# Altium PCB 180222.PcbDoc (part 1 of 5)
Units mil, origin at the board's own origin, x right, y up, seen from the top; angles counter-clockwise.
Board outline 6880.23 x 4505.03 mil, 2 copper layers (Top Layer, Bottom Layer); 136 components, 176 nets, 656 pads, 225 vias.
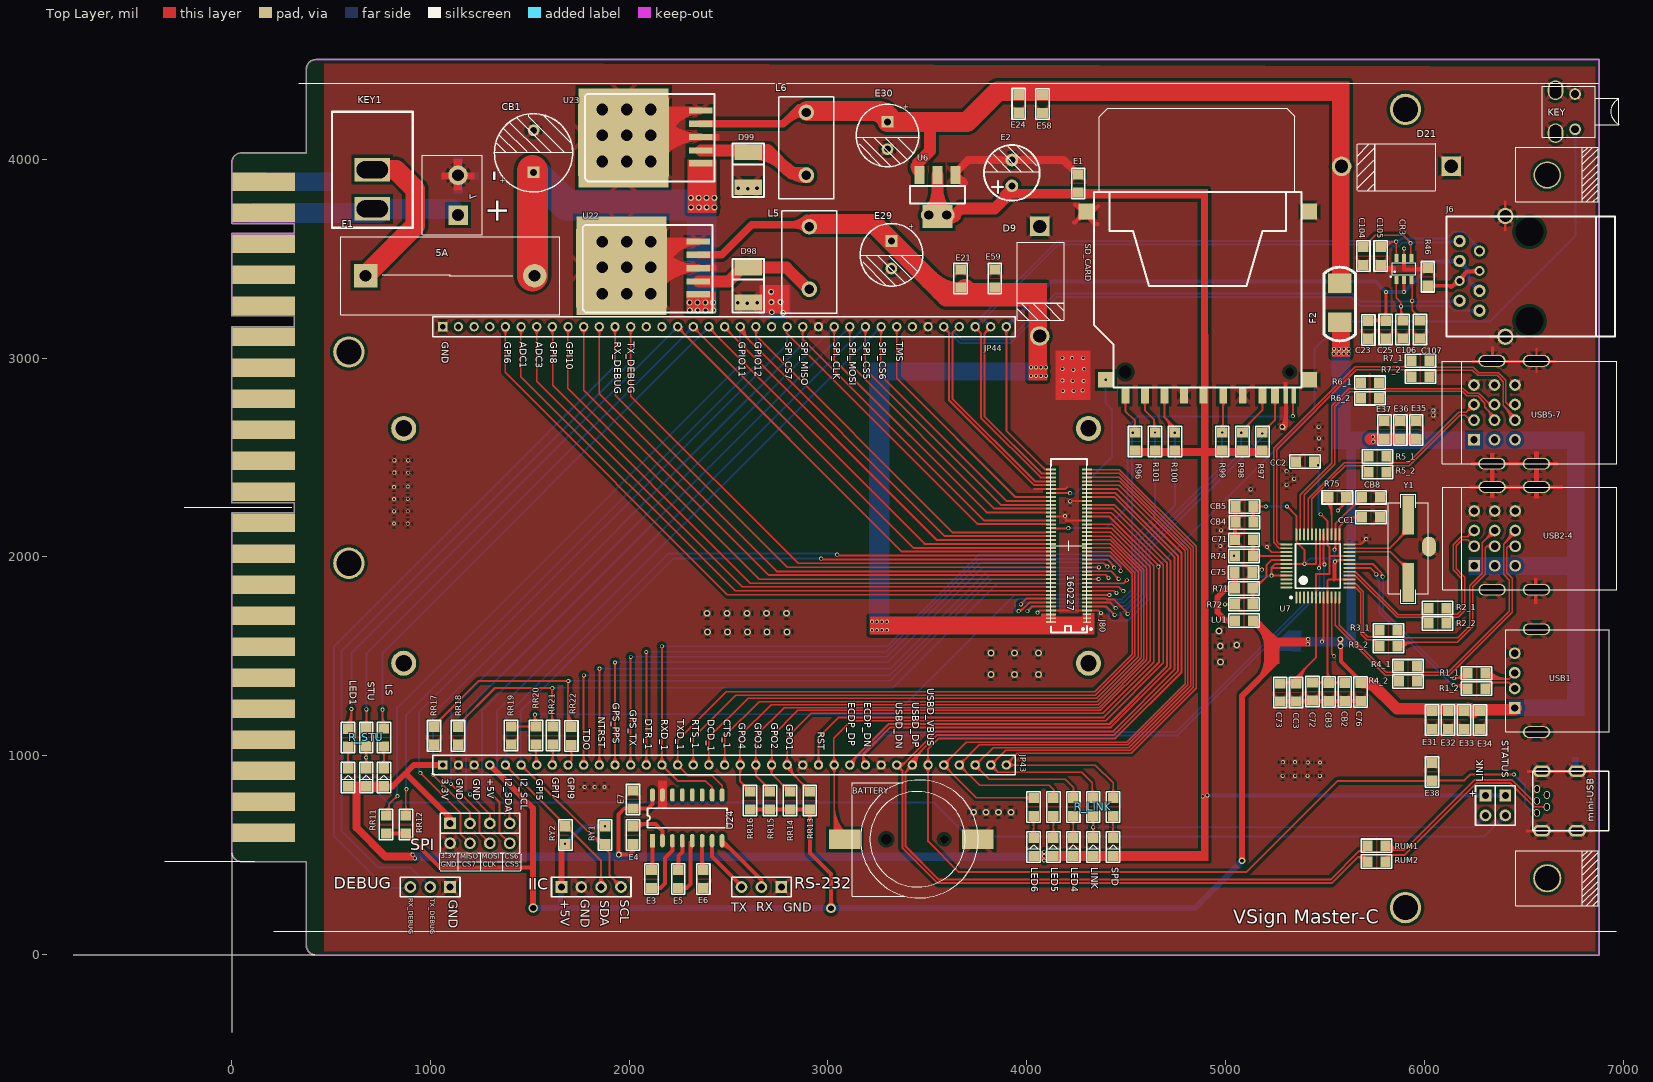
[diagram p0: Top Layer view]
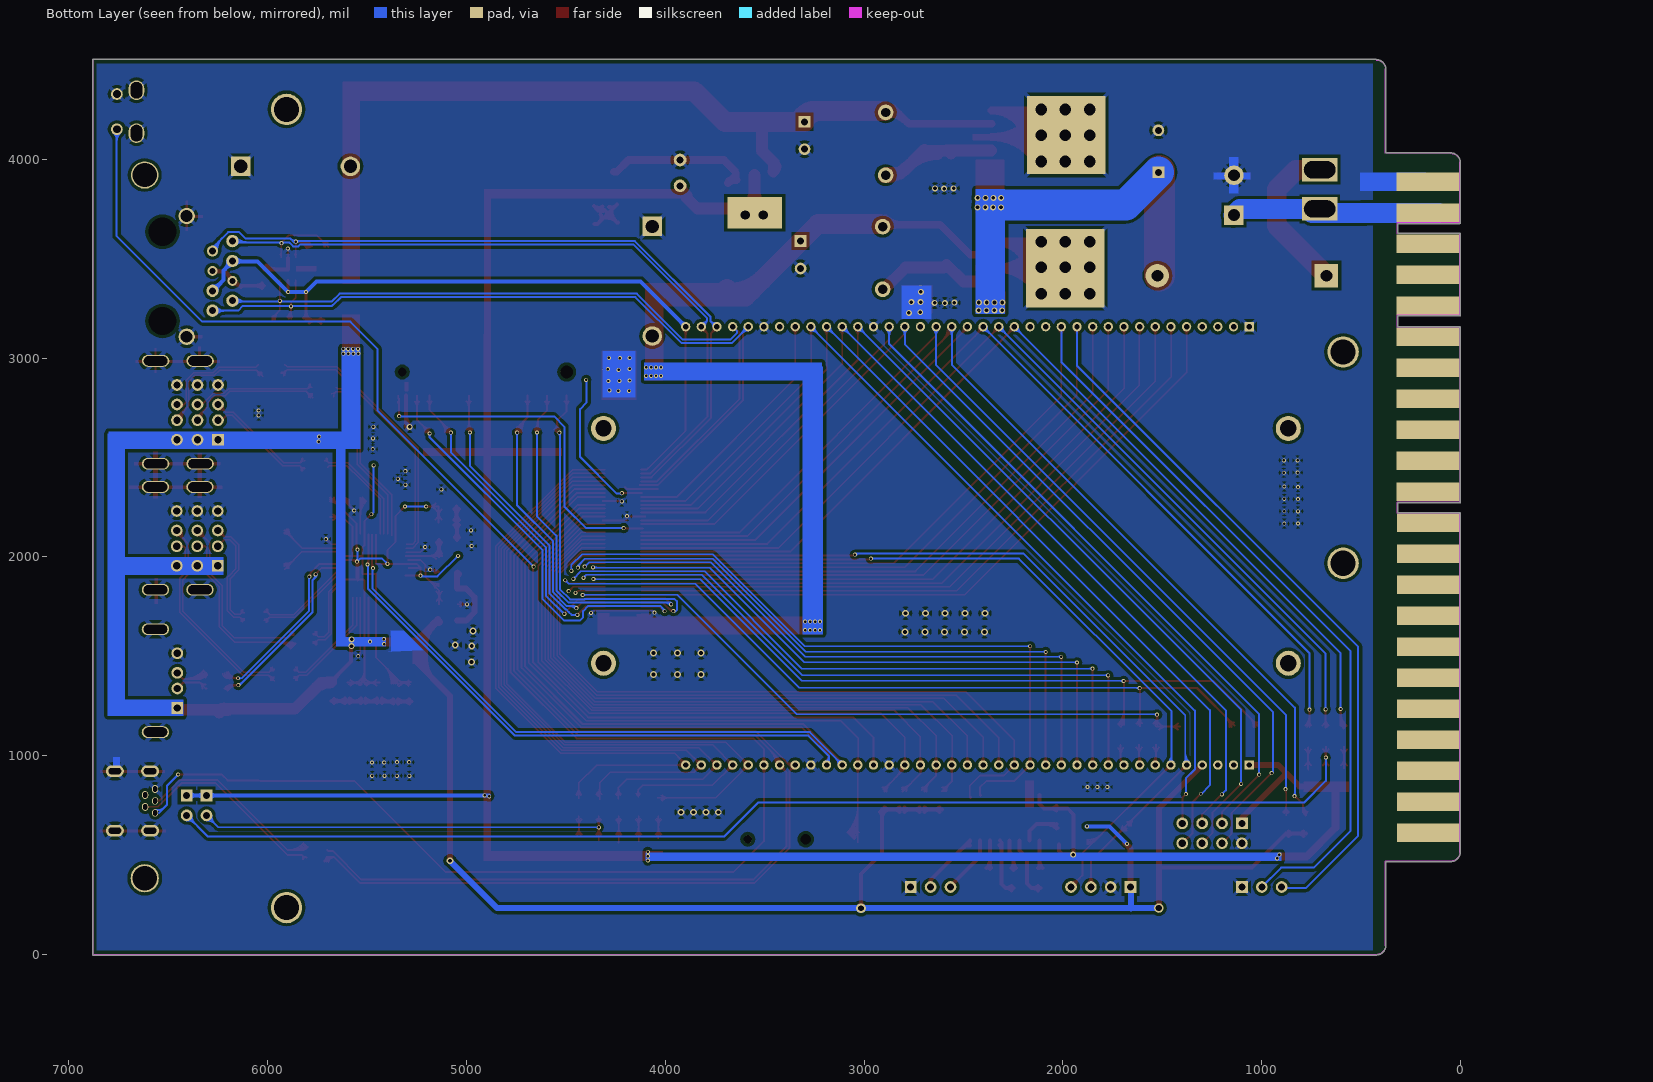
[diagram p1: Bottom Layer view, seen from below]

## Layer stack, top to bottom
Top Solder: solder mask 0.4, Solder Resist, Dk 3.5
Top Layer: signal copper 1.4
Dielectric1: dielectric 12.6, FR-4, Dk 4.8
Bottom Layer: signal copper 1.4
Bottom Solder: solder mask 0.4, Solder Resist, Dk 3.5

## Board outline
1.29,510 1.29,2220 cw(c3.8,2220) 3.8,2222.51 316.48,2222.51 316.48,2272.49 3.8,2272.49 cw(c3.8,2275) 1.29,2275 1.29,3155 cw(c3.8,3155) 3.8,3157.52 316.48,3157.52 316.48,3212.48 3.8,3212.48 cw(c3.8,3215) 1.29,3215 1.29,3625 cw(c3.8,3625) 3.8,3627.52 316.48,3627.52 316.48,3677.48 3.8,3677.48 cw(c3.8,3680) 1.29,3680 1.29,3985 cw(c3.8,3985) 1.78,3986.49 cw(c49,3985.28) 49,4032.52 376.29,4032.52 376.29,4455 cw(c378.8,4455) 376.78,4456.49 cw(c424,4455.28) 424,4502.52 6879,4502.52 cw(c6879,4500) 6881.52,4500 6881.52,0 cw(c6879,0) 6879,-2.51 424,-2.51 cw(c424,0) 422.83,-2.23 cw(c423.72,45) 376.5,44 cw(c378.8,45) 376.29,45 376.29,467.48 49,467.48 cw(c49,470) 47.83,467.77 cw(c48.72,515) 1.96,508.28 cw(c3.8,510)

## Design rules (kind name [scope] priority, off if disabled: settings)
Clearance [All] p1: gap=7
HoleToHoleClearance [All] p1: gap=6 allowstackedmicrovias=TRUE
MinimumSolderMaskSliver [All] p1: minsoldermaskwidth=6
PlaneConnect [All] p1: planeconnectstyle=Relief reliefexpansion=20 reliefentries=4 reliefconductorwidth=20 reliefairgap=10
PolygonConnect [All] p1: connectstyle=Relief reliefconductorwidth=20 reliefentries=4 polygonreliefangle="45 Angle" airgapwidth=10
RoutingVias [All] p1: holewidth=28 width=50 viastyle="Through Hole" minholewidth=28 minwidth=50 maxholewidth=28 maxwidth=50
SilkToSilkClearance [All] p1: silktosilkclearance=6
SilkToSolderMaskClearance SilkscreenOverComponentPads [IsPad] p1: minsilkscreentomaskgap=10 clearancetoexposedcopper=TRUE
SolderMaskExpansion [All] p1: expansion=4
Width [All] p1: maxlimit=100 minlimit=6 preferedwidth=10
25 further rules are at their usual default settings.

## Classes and differential pairs
component class linux_B: BATTERY C2 C3 C4 C5 C7 C8 C9 C10 C21 C23 C25 C37 C39 C42 C44 C47 C71 C72 C73 C75 C89 C90 C104 C105 C106 C107 CB2 CB3 CB4 CB5 CB8 CC1 CC2 CC3 CR1 CR2 CR3 CR41 CR42 D1 D2 D3 D4 D5 D6 D7 D8

## Components (designator, comment, footprint, x,y, rotation, side; value= is the part's Value field where it differs from the comment)
7 "5.08座" CON2_5.08 1140,3720 r90 top
BATTERY "BATTERY座" BATTERY-S 3046,580 r180 top
C23 "1UF" 0805c 5719,3182 r270 top
C25 "1UF" 0805c 5806,3104 r90 top
C71 "104" 0805c 5133,2086 r180 top
C72 "10UF" 0805c 5438,1362 r270 top
C73 "10UF" 0805c 5276,1358 r270 top
C75 "104" 0805c 5052,1922 r0 top
C76 "104" 0805c 5680,1360 r270 top (schematic designator C75)
C104 "150P" 0805c 5694,3474 r90 top
C105 "150P" 0805c 5781,3474 r90 top
C106 "150P" 0805c 5891,3105 r90 top
C107 "150P" 0805c 5978,3105 r90 top
CB1 "1000uF" CAPPR6-10x5/H.9 1520,3920 r90 top
CB2 "Cap" 0805c 5600,1361 r270 top
CB3 "Cap" 0805c 5520,1361 r270 top
CB4 "Cap" 0805c 5135,2174 r180 top
CB5 "Cap" 0805c 5135,2254 r180 top
CB8 "Cap" 0805c 5693,2300 r0 top (schematic designator CB1)
CC1 "Cap" 0805c 5693,2200 r0 top
CC2 "Cap" 0805c 5439,2480 r180 top
CC3 "Cap" 0805c 5356,1358 r270 top
CR3 "DALC208SC6" SOT23_6 5898,3449 r0 top
D9 "1N6373" DO201_AD 4071,3387 r270 top
D11 "LED" 0805_LED1 587,852.35 r90 top
D12 "LED" 0805_LED1 678,852.35 r90 top
D13 "LED" 0805_LED1 767,852.35 r90 top
D14 "LED" 0805_LED1 4235,502 r90 top
D15 "LED" 0805_LED1 4135,502 r90 top
D16 "LED" 0805_LED1 4035,502 r90 top
D17 "LED" 0805_LED1 4335,502 r90 top
D18 "LED" 0805_LED1 4435,502 r90 top
D21 "1N6373" DO201_AD 5860,3960 r180 top
D98 "1N5824" D3.5/5 2600,3280 r180 top
D99 "1N5824" D3.5/5 2600,3860 r180 top (schematic designator D98)
DEBUG "Comment" HDR1X3 1100,340 r180 top
E1 "0.1uf" 0805C 4260,3840 r90 top
E2 "330uF" RE1/3 3926,3932 r90 top
E3 "0.1uf" 0805C 2113,419 r270 top (schematic designator E1)
E4 "0.1uf" 0805C 2020,640 r270 top (schematic designator E1)
E5 "0.1uf" 0805C 2248,419 r270 top (schematic designator E1)
E6 "0.1uf" 0805C 2374,419 r270 top (schematic designator E1)
E7 "0.1uf" 0805C 2020,820 r270 top (schematic designator E1)
E21 "Cap" 0805c 3668,3440 r270 top (schematic designator C73)
E24 "Cap" 0805c 3960,4319 r270 top (schematic designator C73)
E29 "330uF" CAPPR3.5-8x5/H.9 3320,3520 r270 top
E30 "330uF" CAPPR3.5-8x5/H.9 3300,4120 r270 top (schematic designator E29)
E31 "104" 0805c 6040,1220 r270 top (schematic designator C107)
E32 "104" 0805c 6120,1220 r270 top (schematic designator C107)
E33 "104" 0805c 6200,1220 r270 top (schematic designator C107)
E34 "104" 0805c 6280,1220 r270 top (schematic designator C107)
E35 "104" 0805c 5960,2600 r90 top (schematic designator C107)
E36 "104" 0805c 5880,2600 r90 top (schematic designator C107)
E37 "104" 0805c 5800,2600 r90 top (schematic designator C107)
E38 "104" 0805c 6040,880 r90 top (schematic designator C107)
E58 "510" 0805c 4080,4240 r90 top (schematic designator R28)
E59 "510" 0805c 3840,3440 r270 top (schematic designator R28)
F1 "5A" F1保险管座 1100,3415 r0 top
F2 "2A" 1808D 5575,3180 r90 top
IIC "Comment" HDR1X4#1 1660,340 r0 top
J6 "Comment" RJ45_ET8 6525,3410 r0 top
J80 "MHDR2X40" DF12E-80DP-0.5V_X 4213,2056 r180 top
JP43 "Header_37" HDR1X37_2.0 1063.39,953.64 r0 top
JP44 "Header_37" HDR1X37_2.0 1063.39,3158.36 r0 top
KEY "Comment" KEY_90 6759,4240 r270 top
KEY1 "Comment" 2Pin_Key 709,3948 r180 top
L5 "Comment" H_L 2907,3662 r0 top
L6 "Comment" H_L 2892,4236 r0 top
LINK "" HDR1X2 6308,800 r270 top
LU1 "15uH(4.7)" 0805c 5133,1680 r180 top
mini-USB "Comment" mimi_USB直插 6567,773 r90 top
R1_1 "22" 0805c 6303,1415 r180 top (schematic designator 22)
R1_2 "22" 0805c 6303,1338 r180 top (schematic designator 22)
R2_1 "22" 0805c 6107,1743 r180 top (schematic designator 22)
R2_2 "22" 0805c 6107,1666 r180 top (schematic designator 22)
R3_1 "22" 0805c 5860,1631 r180 top (schematic designator 22)
R3_2 "22" 0805c 5860,1551 r180 top (schematic designator 22)
R4_1 "22" 0805c 5958,1451 r180 top (schematic designator 22)
R4_2 "22" 0805c 5958,1374 r180 top (schematic designator 22)
R5_1 "22" 0805c 5804,2506 r180 top (schematic designator 22)
R5_2 "22" 0805c 5804,2427 r180 top (schematic designator 22)
R6_1 "22" 0805c 5766,2877 r180 top (schematic designator 22)
R6_2 "22" 0805c 5766,2798 r180 top (schematic designator 22)
R7_1 "22" 0805c 6020,2987 r180 top (schematic designator 22)
R7_2 "22" 0805c 6020,2907 r180 top (schematic designator 22)
R21 "Res2" 0805c 587,1130.35 r270 top
R23 "Res2" 0805c 767,1131.35 r270 top
R24 "Res2" 0805C 4235,782 r270 top
R25 "Res2" 0805C 4135,782 r270 top
R26 "Res2" 0805C 4035,782 r270 top
R28 "Res2" 0805c 4435,782 r270 top
R46 "0" 0805c 6018,3449 r270 top
R71 "47K" 0805C 5132,1842 r180 top
R72 "100K" 0805C 5132,1762 r180 top
R74 "100K" 0805C 5133,2005 r180 top
R75 "2.7K" 0805C 5602,2300 r180 top
R96 "47K" 0805c 4546,2620 r270 top
R97 "47K" 0805c 5186,2620 r270 top
R98 "47K" 0805c 5086,2620 r270 top
R99 "47K" 0805c 4984,2620 r270 top
R100 "47K" 0805c 4746,2620 r270 top
R101 "47K" 0805c 4646,2620 r270 top
R_LINK "330" 0805C 4335,782 r270 top (schematic designator R27)
R_STU "330" 0805c 678,1132.35 r270 top (schematic designator R22)
RR11 "10K" 0805c 778,693 r270 top (schematic designator R23)
RR12 "10K" 0805c 878,693 r270 top (schematic designator R23)
RR13 "10K" 0805c 2909,814 r270 top (schematic designator R23)
RR14 "10K" 0805c 2810,814 r270 top (schematic designator R23)
RR15 "10K" 0805c 2709,814 r270 top (schematic designator R23)
RR16 "10K" 0805c 2609,814 r270 top (schematic designator R23)
RR17 "Res2" 0805c 1020,1140 r270 top (schematic designator R23)
RR18 "Res2" 0805c 1140,1140 r270 top (schematic designator R23)
RR19 "Res2" 0805c 1407,1141 r270 top (schematic designator R23)
RR20 "Res2" 0805c 1532,1141 r270 top (schematic designator R23)
RR21 "Res2" 0805c 1617,1141 r270 top (schematic designator R23)
RR22 "Res2" 0805c 1710,1139 r270 top (schematic designator R23)
RS-232 "Comment" HDR1X3 2766,340 r180 top
RUM1 "22" 0805c 5800,548 r180 top (schematic designator 22)
RUM2 "22" 0805c 5800,468 r180 top (schematic designator 22)
RY1 "10K" 0805c 1880,640 r270 top (schematic designator R23)
RY2 "10K" 0805c 1680,640 r270 top (schematic designator R23)
SD_CARD "SD_Card_socket" SD_card_soc 4866,3280 r90 top
SPI "Comment" HDR1X4#1 1100,660 r0 top
U6 "AMS1117-3.3" SOT-223 3641.76,3921.75 r180 top
U7 "FE2.1" LQFP48 5464.88,1955.35 r90 top
U22 "LM2596-5V" T0263-5L 2349,3321 r90 top
U23 "LM2596-5V" T0263-5L 2360,3980 r90 top (schematic designator U22)
U24 "Comment" SOP16 2118,573 r90 top
USB1 "USB_L" USB1_DIP 6455,1240 r90 top (schematic designator USB7)
USB2-4 "Comment" USB-3 6565,1835 r90 top
USB5-7 "Comment" USB-3 6564,2469 r90 top
Y1 "12MHZ" XTAL-BS 5920,2043 r90 top
? "Comment" HDR1X4#2 1100,560 r0 top
? "Comment" CON_90#1 6619,3924 r0 top
? "Comment" CON_90#2 6619,384 r0 top
? "" HDR1X2 6408,800 r270 top

## Footprints (in the part's own frame and the unit in brackets; to place one, negate y for a bottom-side part, rotate by r counter-clockwise, add the part's x,y. Pads: shape width x height; smd on the part's side, far side on the other; paste and mask are expansions set on the pad)
2Pin_Key [mm]
  rect 4.5x3 hole 2.2 slot 4 at 0 deg: 1(0,5) 2(0,0)
  silkscreen extent -5.15,-7.4 5.15,7.4
0805_LED1 [mm]
  rect 1.3x1.35 smd: 1(-0.15,0) 2(2.15,0)
  silkscreen extent -0.95,-0.85 2.95,0.85, body extent -0.13,-0.89 2.29,0.89, height 1
0805c [mm]
  rect 1.3x1.35 smd: 1(-0.15,0) 2(2.15,0)
  silkscreen extent -0.95,-0.85 2.95,0.85, body extent -0.13,-0.89 2.29,0.89, height 1
0805C [mm]
  rect 1.3x1.35 smd: 1(-0.15,0) 2(2.15,0)
  silkscreen extent -0.95,-0.85 2.95,0.85, body extent -0.13,-0.89 2.29,0.89, height 1
1808D [mm]
  rect 2.5x3 smd: 1(0,0) 2(5,0)
  silkscreen extent -2.35,-2 7.05,2
BATTERY-S [mm]
  round 1 hole 1.1: 0(-13.7,-0.001)
  round 1 hole 1.3: 0(-6.3,-0.001)
  rect 4x2.5 smd: 1(-1,-0.001) 2(-18,-0.001)
  silkscreen extent -18.06,-7.57 -1.95,7.48
CAPPR3.5-8x5/H.9 [mm]
  rect 0x0 smd: 1(-3.048,0) 2(3.302,0)
  rect 1.5x1.51 hole 0.9: 1(-1.75,0)
  round 1.5 hole 0.9: 2(1.75,0)
  silkscreen extent -4,-4 4,4
CAPPR6-10x5/H.9 [mm]
  rect 1.5x1.51 hole 0.9: 1(0.381,0)
  round 1.5 hole 0.9: 2(5.746,0)
  silkscreen extent -2.12,-5 7.87,5
CON2_5.08 [mm]
  rect 2.5x2.5 hole 1.5: 1(0,0)
  round 2.5 hole 1.5: 2(5.08,0)
  silkscreen extent -2.5,-3.1 7.62,4.57
CON_90#1 [mm]
  round 3.5 hole 3.1: 1(0,-0.07)
  silkscreen extent -4,-3.5 6.52,3.5
CON_90#2 [mm]
  round 3.6 hole 3.1: 1(0,0)
  silkscreen extent -4,-3.5 6.52,3.5
D3.5/5 [mm]
  rect 3.5x2 smd: 1(0,0) 2(0,-4.476)
  silkscreen extent -2.03,-5.59 2.03,1.27
DF12E-80DP-0.5V_X [mm]
  rect 1x0.2 smd: 1(-2.3,9.75) "2 "(-2.3,9.25) 3(-2.3,8.75)
  rect 1.254x0.254 smd: 4(-2.3,8.25) 5(-2.3,7.75) 6(-2.3,7.25) 7(-2.3,6.75) 8(-2.3,6.25) 9(-2.3,5.75) 10(-2.3,5.25) 11(-2.3,4.75) 12(-2.3,4.25) 13(-2.3,3.75) 14(-2.3,3.25) 15(-2.3,2.75) 16(-2.3,2.25) 17(-2.3,1.75) 18(-2.3,1.25) 19(-2.3,0.75) 20(-2.3,0.25) 21(-2.3,-0.25) 22(-2.3,-0.75) 23(-2.3,-1.25) 24(-2.3,-1.75) 25(-2.3,-2.25) 26(-2.3,-2.75) 27(-2.3,-3.25) 28(-2.3,-3.75) 29(-2.3,-4.25) 30(-2.3,-4.75) 31(-2.3,-5.25) 32(-2.3,-5.75) 33(-2.3,-6.25) 34(-2.3,-6.75) 35(-2.3,-7.25) 36(-2.3,-7.75) 37(-2.3,-8.25) 38(-2.3,-8.75) 39(-2.3,-9.25) 40(-2.3,-9.75) 41(2.3,-9.75) 42(2.3,-9.25) 43(2.3,-8.75) 44(2.3,-8.25) 45(2.3,-7.75) 46(2.3,-7.25) 47(2.3,-6.75) 48(2.3,-6.25) 49(2.3,-5.75) 50(2.3,-5.25) 51(2.3,-4.75) 52(2.3,-4.25) 53(2.3,-3.75) 54(2.3,-3.25) 55(2.3,-2.75) 56(2.3,-2.25) 57(2.3,-1.75) 58(2.3,-1.25) 59(2.3,-0.75) 60(2.3,-0.25) 61(2.3,0.25) 62(2.3,0.75) 63(2.3,1.25) 64(2.3,1.75) 65(2.3,2.25) 66(2.3,2.75) 67(2.3,3.25) 68(2.3,3.75) 69(2.3,4.25) 70(2.3,4.75) 71(2.3,5.25) 72(2.3,5.75) 73(2.3,6.25) 74(2.3,6.75) 75(2.3,7.25) 76(2.3,7.75) 77(2.3,8.25) 78(2.3,8.75) 79(2.3,9.25) 80(2.3,9.75)
  silkscreen extent -2.94,-11.09 2.3,11.1
DO201_AD [mm]
  rect 2.5x2.5 hole 1.7: 1(-7,-0.127)
  round 2.5 hole 1.7: 2(7,-0.127)
  silkscreen extent -5,-3.05 5,3
F1保险管座 [mm]
  rect 3x3 hole 1.5: 1(-10.8,0)
  round 3 hole 1.5: 2(10.8,0)
  silkscreen extent -14,-5 14,5
H_L [mm]
  round 2 hole 1.2: 1(0,0) 2(0,-8)
  silkscreen extent -3.56,-11.05 3.56,2.03
HDR1X2 [mm] "Connector; Header; 2 Position"
  rect 1.5x1.5 hole 0.9: 1(0,0)
  round 1.5 hole 0.9: 2(2.54,0)
  silkscreen extent -1.27,-1.27 3.81,1.27
HDR1X3 [mm] "Connector; Header; 3 Position"
  rect 1.5x1.5 hole 0.9: 1(0,0)
  round 1.5 hole 0.9: 2(2.54,0) 3(5.08,0)
  silkscreen extent -1.27,-1.27 6.35,1.27
HDR1X4#1 [mm] "Connector; Header; 4 Position"
  rect 1.5x1.5 hole 0.9: 1(0,0)
  round 1.5 hole 0.9: 2(2.54,0) 3(5.08,0) 4(7.62,0)
  silkscreen extent -1.27,-1.27 8.89,1.27
HDR1X4#2 [mm] "Connector; Header; 4 Position"
  round 1.5 hole 0.9: 1(0,0) 2(2.54,0) 3(5.08,0) 4(7.62,0)
  silkscreen extent -1.27,-1.27 8.89,1.27
HDR1X37_2.0 [mm]
  rect 1.2x1.2 hole 0.7: 1(0,0)
  round 1.2 hole 0.7: 2(2,0) 3(4,0) 4(6,0) 5(8,0) 6(10,0) 7(12,0) 8(14,0) 9(16,0) 10(18,0) 11(20,0) 12(22,0) 13(24,0) 14(26,0) 15(28,0) 16(30,0) 17(32,0) 18(34,0) 19(36,0) 20(38,0) 21(40,0) 22(42,0) 23(44,0) 24(46,0) 25(48,0) 26(50,0) 27(52,0) 28(54,0) 29(56,0) 30(58,0) 31(60,0) 32(62,0) 33(64,0) 34(66,0) 35(68,0) 36(70,0) 37(72,0)
  silkscreen extent -1.27,-1.27 73.15,1.27
KEY_90 [mm]
  round 1.5 hole 1: 1(-2.25,0) 2(2.25,0)
  oval 2.5x2 hole 1.5 slot 2.1 at 0 deg: 3(-2.738,-2.5) 4(2.738,-2.5)
  silkscreen extent -3.25,-4.2 3.25,5.62
LQFP48 [mm]
  oval 1.55x0.25 smd: 1(-4.025,2.75) 2(-4.025,2.25) 3(-4.025,1.75) 4(-4.025,1.25) 5(-4.025,0.75) 6(-4.025,0.25) 7(-4.025,-0.25) 8(-4.025,-0.75) 9(-4.025,-1.25) 10(-4.025,-1.75) 11(-4.025,-2.25) 12(-4.025,-2.75) 25(4.025,-2.75) 26(4.025,-2.25) 27(4.025,-1.75) 28(4.025,-1.25) 29(4.025,-0.75) 30(4.025,-0.25) 31(4.025,0.25) 32(4.025,0.75) 33(4.025,1.25) 34(4.025,1.75) 35(4.025,2.25) 36(4.025,2.75)
  oval 0.25x1.55 smd: 13(-2.75,-4.025) 14(-2.25,-4.025) 15(-1.75,-4.025) 16(-1.25,-4.025) 17(-0.75,-4.025) 18(-0.25,-4.025) 19(0.25,-4.025) 20(0.75,-4.025) 21(1.25,-4.025) 22(1.75,-4.025) 23(2.25,-4.025) 24(2.75,-4.025) 37(2.75,4.025) 38(2.25,4.025) 39(1.75,4.025) 40(1.25,4.025) 41(0.75,4.025) 42(0.25,4.025) 43(-0.25,4.025) 44(-0.75,4.025) 45(-1.25,4.025) 46(-1.75,4.025) 47(-2.25,4.025) 48(-2.75,4.025)
  silkscreen extent -4.15,-2.85 2.85,3.55, body extent -3.5,-3.5 3.5,3.5, height 1.6
mimi_USB直插 [mm]
  oval 0.94x0.8 hole 0.5 slot 0.7 at 0 deg: 1(-1.524,0) 3(0,0)
  oval 1x0.8 hole 0.5 slot 0.7 at 0 deg: 2(-0.762,-1.27) 4(0.762,-1.27) 5(1.524,0)
  oval 1.5x2.3 hole 0.8 slot 1.6 at 90 deg: 6(-3.8,-5.135) 6(-3.8,-0.635) 6(3.8,-5.135) 6(3.8,-0.635)
  silkscreen extent -3.8,-9.15 3.8,0.51
RE1/3 [mil]
  round 64 hole 35: 1(-65,0) 2(65,0)
  silkscreen extent -140,-140 140,140
RJ45_ET8 [mil]
  round 0 hole 141.73: 0(4,-223) 0(4,226)
  round 62 hole 35.04: 1(-247,-171) 2(-347,-121) 3(-247,-71) 6(-347,79) 8(-347,179)
  round 50 hole 30: 4(-347,-21) 5(-247,29)
  round 55.12 hole 35.04: 7(-247,129)
  round 82 hole 60: 13(-117.08,-302) 14(-117.08,305)
  silkscreen extent -413,-302 434,304
SD_card_soc [mm]
  rect 2x1 smd: 1(-11.877,6.877) 2(-11.877,4.377) 3(-11.877,1.877) 4(-11.877,-0.623) 5(-11.877,-3.123) 6(-11.877,-5.623) 7(-11.877,-8.123) 8(-11.877,-9.748) 9(-11.877,9.377)
  rect 2x0.6 smd: 10(-11.877,-12.123) 11(-11.877,-11.123)
  rect 2x2 smd: 12(-9.877,11.877) 13(-9.877,-14.123) 14(11.623,-14.123) 15(11.623,14.377)
  round 1.5 hole 1.6: 16(-8.877,9.377)
  round 1 hole 1.1: 17(-8.877,-11.623)
  silkscreen extent -10.88,-13.12 14.12,13.38
SOP16 [mm]
  rect 1.7x0.61 smd: 1(0,0)
  oval 1.7x0.61 smd: 2(0,-1.27) 3(0,-2.54) 4(0,-3.81) 5(0,-5.08) 6(0,-6.35) 7(0,-7.62) 8(0,-8.89) 9(5.842,-8.89) 10(5.842,-7.62) 11(5.842,-6.35) 12(5.842,-5.08) 13(5.842,-3.81) 14(5.842,-2.54) 15(5.842,-1.27) 16(5.842,0)
  silkscreen extent 1.65,-9.53 4.15,0.64
SOT23_6 [mm]
  rect 0.5x1 smd: 1(-0.95,-1.397) 2(0,-1.397) 3(0.95,-1.397) 4(0.95,1.397) 5(0,1.397) 6(-0.95,1.397)
  silkscreen extent -1.52,-0.76 1.52,0.76
SOT-223 [mm]
  rect 1.3x2.3 smd: 1(0,0) 2(2.3,0) 3(4.6,0)
  rect 3.8x2.9 smd: 2(2.3,5.3)
  silkscreen extent -1.2,1.39 5.81,3.65
T0263-5L [mm]
  rect 10x10 smd: 0(3.353,9.035)
  rect 0.8x3 smd: 1(0,-0.008) 2(1.653,-0.008) 3(3.353,-0.008) 4(5.053,-0.008) 5(6.753,-0.008)
  silkscreen extent -2.32,-1.79 8.89,14.78
USB1_DIP [mm]
  rect 1.5x1.5 hole 0.92: 1(0,0)
  round 1.5 hole 0.92: 2(2.5,0) 3(4.5,0) 4(7,0)
  oval 1.5x3.5 hole 1.2 slot 3 at 90 deg: 5(-3.07,-2.8) 6(10.07,-2.8)
  silkscreen extent -3.05,-12.06 10.03,1.14
USB-3 [mm]
  rect 1.5x1.5 hole 0.92: 1(3.07,7.96)
  round 1.5 hole 0.92: 2(5.57,7.96) 3(7.57,7.96) 4(10.07,7.96) 5(3.07,5.34) 6(5.57,5.34) 7(7.57,5.34) 8(10.07,5.34) 9(3.07,2.72) 10(5.57,2.72) 11(7.57,2.72) 12(10.07,2.72)
  oval 1.5x3.5 hole 1.2 slot 3 at 90 deg: 13(0,5.68) 14(13.14,5.68) 15(0,0) 16(13.14,0)
  silkscreen extent 0.02,-10.28 13.1,12
XTAL-BS [mm]
  rect 5x1.5 smd: 1(-4.342,-0.001) 2(4.269,-0.001)
  silkscreen extent -7.03,-2.57 6.91,2.54, body extent -5.71,-2.67 5.84,2.41, height 1

## Part data
BATTERY: library part BATTERY
C23 C25 C71 C72 C73 C75 C76 C104 C105 C106 C107 E31 E32 E33 E34 E35 E36 E37 E38 R1_1 R1_2 R2_1 R2_2 R3_1 R3_2 R4_1 R4_2 R5_1 R5_2 R6_1 R6_2 R7_1 R7_2 RUM1 RUM2: library part Cap, "Capacitor"
CB2 CB3 CB4 CB5 CB8 CC1 CC2 CC3 E21 E24: "Capacitor"
D11 D12 D13 D14 D15 D16 D17 D18: library part LED0, "Typical INFRARED GaAs LED"
D98 D99: library part "D Zener", "Zener Diode"
E1 E3 E4 E5 E6 E7: library part CAP
E2: library part 电解电容, "Capacitor"
E29 E30: library part "Cap Pol1", "Polarized Capacitor (Radial)"
E58 E59 R46 R71 R72 R74 R75 R96 R97 R98 R99 R100 R101 R_LINK R_STU RR11 RR12 RR13 RR14 RR15 RR16 RY1 RY2: library part Res2, "Resistor"
LU1: library part L
R21 R23 R24 R25 R26 R28 RR17 RR18 RR19 RR20 RR21 RR22: "Resistor"
U6: library part AS1117
U22 U23: library part LM2596
Y1: library part XTAL, "Crystal Oscillator"

## Free pads (board coordinates)
  round 157.48 hole 125.98: 0(590.55,1968.5) 0(590.55,3031.5) 0(5905.51,236.22) 0(5905.51,4251.97)
  rect 78.74x393.7 smd: 0(1773,3453) 0(1783,4113)
  rect 452.76x78.74 smd: 0(1961,3673) 0(1962,3256) 0(1972,3898) 0(1973,4318)
  rect 393.7x393.7 smd far side: 0(1983,4123) 0(1989,3453)
  round 125.98 hole 82.68: 0(4311.43,2646.55) 1(4311.43,1465.45) 2(866.54,2646.55) 3(866.54,1465.45)
  oval 70x100 smd: 0(6024,2052)
  rect 314.96x94.09 smd: 1(161.48,3887.01) 2(161.48,3731.1) 3(161.48,3575.2) 4(161.48,3419.29) 5(161.48,3263.39) 6(161.48,3107.48) 7(161.48,2951.57) 8(161.48,2795.67) 9(161.48,2639.76) 10(161.48,2483.86) 11(161.48,2327.95) 12(161.48,2172.05) 13(161.48,2016.14) 14(161.48,1860.24) 15(161.48,1704.33) 16(161.48,1548.43) 17(161.48,1392.52) 18(161.48,1236.61) 19(161.48,1080.71) 20(161.48,924.8) 21(161.48,768.9) 22(161.48,612.99)
  round 86.61 hole 59.06: 2(1865,3586) 2(1865,4251) 2(1988,3586) 2(1988,4251) 2(2110,3586) 2(2110,4251) 3(1865,3457) 3(1865,4122) 3(1988,3457) 3(1988,4122) 3(2110,3457) 3(2110,4122) 4(1865,3324) 4(1865,3989) 4(1988,3324) 4(1988,3989) 4(2110,3324) 4(2110,3989)
  round 78.74 hole 47.24: 2(3508,3720) 2(3598,3720)
  round 47.24 hole 31.5: 3(1518,234)
  round 30 hole 18: 3(1949,503)
  rect 275.59x157.48 smd far side: 5(3550,3732)
  rect 314.96x94.09 smd far side: A(164,3887.01) B(164,3731.1) C(164,3575.2) D(164,3419.29) E(164,3263.39) F(164,3107.48) G(164,2951.57) H(164,2795.67) I(164,2639.76) J(164,2483.86) K(164,2327.95) L(161.48,2172.05) M(161.48,2016.14) N(161.48,1860.24) O(161.48,1704.33) P(161.48,1548.43) Q(161.48,1392.52) R(161.48,1236.61) S(161.48,1080.71) T(161.48,924.8) U(161.48,768.9) V(161.48,612.99)

## Via types
v1: diameter 20, hole 12, Top Layer to Bottom Layer, 169 vias
v2: diameter 30, hole 18, Top Layer to Bottom Layer, 30 vias
v3: diameter 35, hole 20, Top Layer to Bottom Layer, 25 vias
v4: diameter 50, hole 28, Top Layer to Bottom Layer, 1 vias

## Nets (pads, with @x,y where several pads share a name; then routed paths per layer and width w, separated by ;. In a path a pad name is that pad's centre, name@x,y a point inside that pad or via, vN(x,y) a via of type N, cw(c..) or ccw(c..) an arc to the next point about the centre after c; other vN are vias at no path point)
-CTS_1: J80.22 JP43.19 | length 3552.7
  Top Layer w7: JP43.19@2481,956 2481,1100 2654,1273 4355.2,1273 4576,1493.8 4576,1930 ; J80.22@4303.55,2085.53 4420.45,2085.53 4575.49,1930.49 ; JP43.19@2466.49,967.87 ccw(c2431.45,1002.9) 2481,1002.9 ; JP43.19@2466.49,967.87 ccw(c2431.45,1002.9) 2481,1002.9 ; JP43.19@2466.49,967.87 ccw(c2431.45,1002.9) 2481,1002.9 ; JP43.19@2471.44,962.92 ccw(c2448.35,986) 2481,986 ; JP43.19@2471.44,962.92 ccw(c2448.35,986) 2481,986 ; JP43.19@2471.44,962.92 ccw(c2448.35,986) 2481,986 ; 2481,984.63 ccw(c2511.71,984.63) JP43.19@2489.99,962.92 ; 2481,984.63 ccw(c2511.71,984.63) JP43.19@2489.99,962.92 ; 2481,984.63 ccw(c2511.71,984.63) JP43.19@2489.99,962.92 ; 2481,1001.53 ccw(c2528.61,1001.53) JP43.19@2494.94,967.87 ; 2481,1001.53 ccw(c2528.61,1001.53) JP43.19@2494.94,967.87 ; 2481,1001.53 ccw(c2528.61,1001.53) JP43.19@2494.94,967.87
-DCD_1: J80.21 JP43.18 | length 3587.6
  Top Layer w7: JP43.18@2401,953 2401,1092 2599,1290 4352,1290 4561,1499 4561,1925 ; J80.21@4303.55,2065.84 4420.34,2065.84 4561.09,1925.09 ; JP43.18@2387.75,967.87 ccw(c2355.75,999.86) 2401,999.86 ; JP43.18@2387.75,967.87 ccw(c2355.75,999.86) 2401,999.86 ; JP43.18@2387.75,967.87 ccw(c2355.75,999.86) 2401,999.86 ; JP43.18@2392.7,962.92 ccw(c2372.65,982.96) 2401,982.96 ; JP43.18@2392.7,962.92 ccw(c2372.65,982.96) 2401,982.96 ; JP43.18@2392.7,962.92 ccw(c2372.65,982.96) 2401,982.96 ; 2401,987.67 ccw(c2436.01,987.67) JP43.18@2411.25,962.92 ; 2401,987.67 ccw(c2436.01,987.67) JP43.18@2411.25,962.92 ; 2401,987.67 ccw(c2436.01,987.67) JP43.18@2411.25,962.92 ; 2401,1004.57 ccw(c2452.91,1004.57) JP43.18@2416.2,967.87 ; 2401,1004.57 ccw(c2452.91,1004.57) JP43.18@2416.2,967.87 ; 2401,1004.57 ccw(c2452.91,1004.57) JP43.18@2416.2,967.87
-DTR_1: J80.17 JP43.14 | length 3799.6
  Top Layer w7: J80.17@4303.55,1987.1 4357,1987.1 ; 4361.1,1987.1 4357,1987.1 ; v1@4436,1943 4442,1949 4442,1952 4406.9,1987.1 4357,1987.1 ; 4423.25,1970.75 cw(c4398.49,1946) 4433.5,1946 ccw(c4398.49,1946) 4423.25,1970.75 ; 4435.2,1958.8 cw(c4422.39,1946) 4440.5,1946 ccw(c4422.39,1946) 4435.2,1958.8
  Top Layer w10: v1@2083.22,1518.46 cw(c2074.06,1509.3) 2087.01,1509.3 ; JP43.14@2087.01,953.64 v1@2087.01,1523 ; 2087.01,1510.56 cw(c2098.2,1510.56) v1@2090.29,1518.46 ; JP43.14@2073.85,966.81 ccw(c2042.06,998.6) 2087.01,998.6 ; JP43.14@2073.85,966.81 ccw(c2042.06,998.6) 2087.01,998.6 ; JP43.14@2073.85,966.81 ccw(c2042.06,998.6) 2087.01,998.6 ; 2087.01,998.6 ccw(c2131.97,998.6) JP43.14@2100.18,966.81 ; 2087.01,998.6 ccw(c2131.97,998.6) JP43.14@2100.18,966.81 ; 2087.01,998.6 ccw(c2131.97,998.6) JP43.14@2100.18,966.81 ; v1@2081.78,1519.46 cw(c2069.14,1506.82) 2087.02,1506.82 ccw(c2069.14,1506.82) v1@2081.78,1519.46
  Bottom Layer w7: v1@2086.05,1523 3295,1523 3762,1990 4406,1990 4440,1956 v1(4440,1946) ; 2101.01,1523 cw(c2101.01,1538.69) 2089.91,1527.6 ccw(c2101.01,1538.69) 2101.01,1523 ; 2101.01,1523 ccw(c2101.01,1507.31) 2089.91,1518.4 cw(c2101.01,1507.31) 2101.01,1523 ; 4421.83,1974.17 cw(c4393.67,1946) 4433.5,1946 ccw(c4393.67,1946) 4421.83,1974.17 ; 4433.78,1962.22 cw(c4417.56,1946) 4440.5,1946 ccw(c4417.56,1946) 4433.78,1962.22
  other v1: 2086.76,1522
-LED_1: J80.62 JP44.16 R21.1 | length 6297.6
  Top Layer w7: R21.1@603,1149.35 R21.1@603,1152.26 ; JP44.16@2244.5,3138.24 cw(c2244.5,3098.97) 2272.26,3126.74 ; JP44.16@2244.5,3138.24 cw(c2244.5,3098.97) 2272.26,3126.74 ; JP44.16@2244.5,3138.24 cw(c2244.5,3098.97) 2272.26,3126.74 ; JP44.16@2244.5,3145.24 cw(c2244.5,3122.87) 2260.31,3138.69 ; JP44.16@2244.5,3145.24 cw(c2244.5,3122.87) 2260.31,3138.69 ; JP44.16@2244.5,3145.24 cw(c2244.5,3122.87) 2260.31,3138.69 ; JP44.16@2257.62,3158.36 ccw(c2298.61,3158.36) 2269.62,3129.38 ; JP44.16@2257.62,3158.36 ccw(c2298.61,3158.36) 2269.62,3129.38 ; JP44.16@2257.62,3158.36 ccw(c2298.61,3158.36) 2269.62,3129.38 ; JP44.16@2264.62,3158.36 ccw(c2322.51,3158.36) 2281.57,3117.43 ; JP44.16@2264.62,3158.36 ccw(c2322.51,3158.36) 2281.57,3117.43 ; JP44.16@2264.62,3158.36 ccw(c2322.51,3158.36) 2281.57,3117.43
  Top Layer w10: R21.1@603,1152.26 v1(603,1235.35) ; JP44.16@2244,3155 3372.53,2026.47 J80.62@4122.45,2026.47 ; R21.1@573.43,1150.82 ccw(c502.03,1222.22) 603,1222.22 ; R21.1@573.43,1150.82 ccw(c502.03,1222.22) 603,1222.22 ; R21.1@573.43,1150.82 ccw(c502.03,1222.22) 603,1222.22 ; R21.1@580.5,1143.75 ccw(c526.17,1198.08) 603,1198.08 ; R21.1@580.5,1143.75 ccw(c526.17,1198.08) 603,1198.08 ; R21.1@580.5,1143.75 ccw(c526.17,1198.08) 603,1198.08 ; R21.1@587.57,1136.68 ccw(c550.31,1173.93) 603,1173.93 ; R21.1@587.57,1136.68 ccw(c550.31,1173.93) 603,1173.93 ; R21.1@587.57,1136.68 ccw(c550.31,1173.93) 603,1173.93 ; v1@599.47,1231.82 cw(c590.93,1223.28) 603,1223.28 ; v1@599.47,1231.82 cw(c590.93,1223.28) 603,1223.28 ; v1@599.47,1231.82 cw(c590.93,1223.28) 603,1223.28 ; 603,1223.28 cw(c615.07,1223.28) v1@606.54,1231.82 ; 603,1223.28 cw(c615.07,1223.28) v1@606.54,1231.82 ; 603,1223.28 cw(c615.07,1223.28) v1@606.54,1231.82
  Bottom Layer w7: v1@605,1240.35 605,1231.35 v1@603,1233.35 ; v1@603,1233.35 v1(603,1235.35) v1@603,1233.35
  Bottom Layer w10: v1(603,1235.35) 603,1516.87 JP44.16@2244.5,3158.36 ; v1@599.47,1238.89 ccw(c590.93,1247.43) 603,1247.43 ; v1@599.47,1238.89 ccw(c590.93,1247.43) 603,1247.43 ; v1@599.47,1238.89 ccw(c590.93,1247.43) 603,1247.43 ; 603,1247.43 ccw(c615.07,1247.43) v1@606.54,1238.89 ; 603,1247.43 ccw(c615.07,1247.43) v1@606.54,1238.89 ; 603,1247.43 ccw(c615.07,1247.43) v1@606.54,1238.89 ; 2212.71,3126.57 cw(c2244.5,3094.78) JP44.16@2244.5,3139.74 ; 2212.71,3126.57 ccw(c2180.92,3158.36) JP44.16@2225.87,3158.36 ; 2212.71,3126.57 cw(c2244.5,3094.78) JP44.16@2244.5,3139.74 ; 2212.71,3126.57 ccw(c2180.92,3158.36) JP44.16@2225.87,3158.36 ; 2212.71,3126.57 ccw(c2180.92,3158.36) JP44.16@2225.87,3158.36 ; 2212.71,3126.57 cw(c2244.5,3094.78) JP44.16@2244.5,3139.74
-LED_2: J80.61 JP44.17 R_STU.1 | length 5966.4
  Top Layer w7: JP44.17@2323.24,3138.24 cw(c2323.24,3100.76) 2349.74,3127.26 ; JP44.17@2323.24,3138.24 cw(c2323.24,3100.76) 2349.74,3127.26 ; JP44.17@2323.24,3138.24 cw(c2323.24,3100.76) 2349.74,3127.26 ; JP44.17@2323.24,3145.24 cw(c2323.24,3124.66) 2337.79,3139.21 ; JP44.17@2323.24,3145.24 cw(c2323.24,3124.66) 2337.79,3139.21 ; JP44.17@2323.24,3145.24 cw(c2323.24,3124.66) 2337.79,3139.21 ; JP44.17@2336.36,3158.36 ccw(c2379.14,3158.36) 2348.89,3128.11 ; JP44.17@2336.36,3158.36 ccw(c2379.14,3158.36) 2348.89,3128.11 ; JP44.17@2336.36,3158.36 ccw(c2379.14,3158.36) 2348.89,3128.11 ; JP44.17@2343.36,3158.36 ccw(c2403.04,3158.36) 2360.84,3116.16 ; JP44.17@2343.36,3158.36 ccw(c2403.04,3158.36) 2360.84,3116.16 ; JP44.17@2343.36,3158.36 ccw(c2403.04,3158.36) 2360.84,3116.16
  Top Layer w10: R_STU.1@679,1141.35 v1(679,1233.35) ; JP44.17@2320,3157 3430.84,2046.16 J80.61@4122.45,2046.16 ; R_STU.1@664.43,1152.82 ccw(c629.24,1188.01) 679,1188.01 ; R_STU.1@664.43,1152.82 ccw(c629.24,1188.01) 679,1188.01 ; R_STU.1@664.43,1152.82 ccw(c629.24,1188.01) 679,1188.01 ; R_STU.1@671.5,1145.75 ccw(c653.38,1163.86) 679,1163.86 ; R_STU.1@671.5,1145.75 ccw(c653.38,1163.86) 679,1163.86 ; R_STU.1@671.5,1145.75 ccw(c653.38,1163.86) 679,1163.86 ; v1@675.47,1229.82 cw(c666.93,1221.28) 679,1221.28 ; v1@675.47,1229.82 cw(c666.93,1221.28) 679,1221.28 ; v1@675.47,1229.82 cw(c666.93,1221.28) 679,1221.28 ; 679,1187.93 ccw(c728.66,1187.93) R_STU.1@693.55,1152.82 ; 679,1187.93 ccw(c728.66,1187.93) R_STU.1@693.55,1152.82 ; 679,1187.93 ccw(c728.66,1187.93) R_STU.1@693.55,1152.82 ; 679,1221.28 cw(c691.07,1221.28) v1@682.54,1229.82 ; 679,1221.28 cw(c691.07,1221.28) v1@682.54,1229.82 ; 679,1221.28 cw(c691.07,1221.28) v1@682.54,1229.82
  Bottom Layer w7: v1@679,1229 v1(679,1233.35) v1@682,1233.35
  Bottom Layer w10: v1(679,1233.35) 679,1514.13 JP44.17@2323.24,3158.36 ; v1@675.47,1236.89 ccw(c666.93,1245.43) 679,1245.43 ; v1@675.47,1236.89 ccw(c666.93,1245.43) 679,1245.43 ; v1@675.47,1236.89 ccw(c666.93,1245.43) 679,1245.43 ; 679,1245.43 ccw(c691.07,1245.43) v1@682.54,1236.89 ; 679,1245.43 ccw(c691.07,1245.43) v1@682.54,1236.89 ; 679,1245.43 ccw(c691.07,1245.43) v1@682.54,1236.89 ; 2291.45,3126.57 cw(c2323.24,3094.78) JP44.17@2323.24,3139.74 ; 2291.45,3126.57 ccw(c2259.66,3158.36) JP44.17@2304.61,3158.36 ; 2291.45,3126.57 cw(c2323.24,3094.78) JP44.17@2323.24,3139.74 ; 2291.45,3126.57 ccw(c2259.66,3158.36) JP44.17@2304.61,3158.36 ; 2291.45,3126.57 ccw(c2259.66,3158.36) JP44.17@2304.61,3158.36 ; 2291.45,3126.57 cw(c2323.24,3094.78) JP44.17@2323.24,3139.74
-LED_3: J80.60 JP44.18 R23.1 | length 5965.2
  Top Layer w7: JP44.18@2401.98,3138.24 cw(c2401.98,3107.38) 2423.8,3129.2 ; JP44.18@2401.98,3138.24 cw(c2401.98,3107.38) 2423.8,3129.2 ; JP44.18@2401.98,3138.24 cw(c2401.98,3107.38) 2423.8,3129.2 ; JP44.18@2408.1,3158.36 ccw(c2440.59,3158.36) 2417.61,3135.39 ; JP44.18@2408.1,3158.36 ccw(c2440.59,3158.36) 2417.61,3135.39 ; JP44.18@2408.1,3158.36 ccw(c2440.59,3158.36) 2417.61,3135.39 ; JP44.18@2415.1,3158.36 ccw(c2464.49,3158.36) 2429.56,3123.44 ; JP44.18@2415.1,3158.36 ccw(c2464.49,3158.36) 2429.56,3123.44 ; JP44.18@2415.1,3158.36 ccw(c2464.49,3158.36) 2429.56,3123.44 ; JP44.18@2422.1,3158.36 ccw(c2488.39,3158.36) 2441.51,3111.49 ; JP44.18@2422.1,3158.36 ccw(c2488.39,3158.36) 2441.51,3111.49 ; JP44.18@2422.1,3158.36 ccw(c2488.39,3158.36) 2441.51,3111.49
  Top Layer w10: R23.1@760,1144.26 v1(760,1232.35) ; JP44.18@2398,3155 3487.16,2065.84 J80.60@4122.45,2065.84 ; R23.1@751.46,1151.82 ccw(c730.83,1172.44) 760,1172.44 ; R23.1@751.46,1151.82 ccw(c730.83,1172.44) 760,1172.44 ; R23.1@751.46,1151.82 ccw(c730.83,1172.44) 760,1172.44 ; v1@756.47,1228.82 cw(c747.93,1220.28) 760,1220.28 ; v1@756.47,1228.82 cw(c747.93,1220.28) 760,1220.28 ; v1@756.47,1228.82 cw(c747.93,1220.28) 760,1220.28 ; 760,1177.35 ccw(c806.11,1177.35) R23.1@773.51,1144.75 ; 760,1177.35 ccw(c806.11,1177.35) R23.1@773.51,1144.75 ; 760,1177.35 ccw(c806.11,1177.35) R23.1@773.51,1144.75 ; 760,1201.49 ccw(c830.25,1201.49) R23.1@780.58,1151.82 ; 760,1201.49 ccw(c830.25,1201.49) R23.1@780.58,1151.82 ; 760,1201.49 ccw(c830.25,1201.49) R23.1@780.58,1151.82 ; 760,1220.28 cw(c772.07,1220.28) v1@763.54,1228.82 ; 760,1220.28 cw(c772.07,1220.28) v1@763.54,1228.82 ; 760,1220.28 cw(c772.07,1220.28) v1@763.54,1228.82
  Bottom Layer w7: v1@760,1231.35 v1(760,1232.35) v1@761,1232.35 ; v1@761,1231.35 v1@761,1232.35 ; v1@763,1232.35 v1@761,1232.35
  Bottom Layer w10: v1(760,1232.35) 760,1516.39 JP44.18@2401.98,3158.36 ; v1@756.47,1235.89 ccw(c747.93,1244.43) 760,1244.43 ; v1@756.47,1235.89 ccw(c747.93,1244.43) 760,1244.43 ; v1@756.47,1235.89 ccw(c747.93,1244.43) 760,1244.43 ; 760,1244.43 ccw(c772.07,1244.43) v1@763.54,1235.89 ; 760,1244.43 ccw(c772.07,1244.43) v1@763.54,1235.89 ; 760,1244.43 ccw(c772.07,1244.43) v1@763.54,1235.89 ; 2370.19,3126.57 cw(c2401.98,3094.78) JP44.18@2401.98,3139.74 ; 2370.19,3126.57 ccw(c2338.4,3158.36) JP44.18@2383.35,3158.36 ; 2370.19,3126.57 cw(c2401.98,3094.78) JP44.18@2401.98,3139.74 ; 2370.19,3126.57 ccw(c2338.4,3158.36) JP44.18@2383.35,3158.36 ; 2370.19,3126.57 ccw(c2338.4,3158.36) JP44.18@2383.35,3158.36 ; 2370.19,3126.57 cw(c2401.98,3094.78) JP44.18@2401.98,3139.74
-LED_4: J80.38 JP43.35 R24.1 | length 4361.5
  Top Layer w7: JP43.35@3740.56,953.64 3742.1,952.1 3813.19,881 4194,881 4236,839 ; JP43.35@3742,952 3831,1041 4514.6,1041 4825,1351.4 4825,2042.36 4466.87,2400.49 J80.38@4303.55,2400.49 ; R24.1@4236,782 4236,839 ; JP43.35@3740.56,933.52 cw(c3740.56,884.94) 3774.91,919.29 ; JP43.35@3740.56,933.52 cw(c3740.56,884.94) 3774.91,919.29 ; JP43.35@3740.56,933.52 cw(c3740.56,884.94) 3774.91,919.29 ; JP43.35@3740.56,940.52 cw(c3740.56,908.84) 3762.96,931.24 ; JP43.35@3740.56,940.52 cw(c3740.56,908.84) 3762.96,931.24 ; JP43.35@3740.56,940.52 cw(c3740.56,908.84) 3762.96,931.24 ; JP43.35@3740.56,966.76 ccw(c3740.56,1005.88) 3768.22,978.22 ; JP43.35@3740.56,966.76 ccw(c3740.56,1005.88) 3768.22,978.22 ; JP43.35@3740.56,966.76 ccw(c3740.56,1005.88) 3768.22,978.22 ; JP43.35@3740.56,973.76 ccw(c3740.56,1029.78) 3780.17,990.17 ; JP43.35@3740.56,973.76 ccw(c3740.56,1029.78) 3780.17,990.17 ; JP43.35@3740.56,973.76 ccw(c3740.56,1029.78) 3780.17,990.17 ; JP43.35@3753.68,953.64 ccw(c3785.36,953.64) 3762.96,931.24 ; JP43.35@3753.68,953.64 cw(c3777.92,953.64) 3760.78,970.78 ; JP43.35@3753.68,953.64 ccw(c3785.36,953.64) 3762.96,931.24 ; JP43.35@3753.68,953.64 cw(c3777.92,953.64) 3760.78,970.78 ; JP43.35@3753.68,953.64 cw(c3777.92,953.64) 3760.78,970.78 ; JP43.35@3753.68,953.64 ccw(c3785.36,953.64) 3762.96,931.24 ; JP43.35@3760.68,953.64 ccw(c3809.26,953.64) 3774.91,919.29 ; JP43.35@3760.68,953.64 cw(c3801.82,953.64) 3772.73,982.73 ; JP43.35@3760.68,953.64 ccw(c3809.26,953.64) 3774.91,919.29 ; JP43.35@3760.68,953.64 cw(c3801.82,953.64) 3772.73,982.73 ; JP43.35@3760.68,953.64 cw(c3801.82,953.64) 3772.73,982.73 ; JP43.35@3760.68,953.64 ccw(c3809.26,953.64) 3774.91,919.29 ; R24.1@4220.86,804.01 ccw(c4188,839) 4236,839 ; R24.1@4220.86,804.01 ccw(c4188,839) 4236,839 ; R24.1@4220.86,804.01 ccw(c4188,839) 4236,839 ; R24.1@4225.65,798.91 ccw(c4203.19,822.82) 4236,822.82 ; R24.1@4225.65,798.91 ccw(c4203.19,822.82) 4236,822.82 ; R24.1@4225.65,798.91 ccw(c4203.19,822.82) 4236,822.82 ; 4236,822.8 ccw(c4268.82,822.8) R24.1@4246.33,798.9 ; 4236,822.8 ccw(c4268.82,822.8) R24.1@4246.33,798.9 ; 4236,822.8 ccw(c4268.82,822.8) R24.1@4246.33,798.9 ; 4236,839 ccw(c4284.07,839) R24.1@4251.12,803.99 ; 4236,839 ccw(c4284.07,839) R24.1@4251.12,803.99 ; 4236,839 ccw(c4284.07,839) R24.1@4251.12,803.99
-LED_5: J80.37 JP43.34 R25.1 | length 4254.2
  Top Layer w7: JP43.34@3659,951 3763,1055 4508.8,1055 4811,1357.2 4811,2036.56 4467.56,2380 4304.35,2380 J80.37@4303.55,2380.8 ; JP43.34@3661.82,953.64 3763.45,852 4115,852 4137,830 ; R25.1@4137,792 4137,830 ; JP43.34@3661.82,933.52 cw(c3661.82,884.94) 3696.17,919.29 ; JP43.34@3661.82,933.52 cw(c3661.82,884.94) 3696.17,919.29 ; JP43.34@3661.82,933.52 cw(c3661.82,884.94) 3696.17,919.29 ; JP43.34@3661.82,940.52 cw(c3661.82,908.84) 3684.22,931.24 ; JP43.34@3661.82,940.52 cw(c3661.82,908.84) 3684.22,931.24 ; JP43.34@3661.82,940.52 cw(c3661.82,908.84) 3684.22,931.24 ; JP43.34@3661.82,966.76 ccw(c3661.82,998.01) 3683.91,975.91 ; JP43.34@3661.82,966.76 ccw(c3661.82,998.01) 3683.91,975.91 ; JP43.34@3661.82,966.76 ccw(c3661.82,998.01) 3683.91,975.91 ; JP43.34@3661.82,973.76 ccw(c3661.82,1021.91) 3695.86,987.86 ; JP43.34@3661.82,973.76 ccw(c3661.82,1021.91) 3695.86,987.86 ; JP43.34@3661.82,973.76 ccw(c3661.82,1021.91) 3695.86,987.86 ; JP43.34@3674.94,953.64 ccw(c3706.62,953.64) 3684.22,931.24 ; JP43.34@3674.94,953.64 cw(c3707.05,953.64) 3684.34,976.34 ; JP43.34@3674.94,953.64 ccw(c3706.62,953.64) 3684.22,931.24 ; JP43.34@3674.94,953.64 cw(c3707.05,953.64) 3684.34,976.34 ; JP43.34@3674.94,953.64 cw(c3707.05,953.64) 3684.34,976.34 ; JP43.34@3674.94,953.64 ccw(c3706.62,953.64) 3684.22,931.24 ; JP43.34@3681.94,953.64 ccw(c3730.52,953.64) 3696.17,919.29 ; JP43.34@3681.94,953.64 cw(c3730.95,953.64) 3696.29,988.29 ; JP43.34@3681.94,953.64 ccw(c3730.52,953.64) 3696.17,919.29 ; JP43.34@3681.94,953.64 cw(c3730.95,953.64) 3696.29,988.29 ; JP43.34@3681.94,953.64 cw(c3730.95,953.64) 3696.29,988.29 ; JP43.34@3681.94,953.64 ccw(c3730.52,953.64) 3696.17,919.29 ; R25.1@4124.12,806.54 ccw(c4109.2,830) 4137,830 ; R25.1@4124.12,806.54 ccw(c4109.2,830) 4137,830 ; R25.1@4124.12,806.54 ccw(c4109.2,830) 4137,830 ; R25.1@4127.88,800.64 ccw(c4117.31,817.25) 4137,817.25 ; R25.1@4127.88,800.64 ccw(c4117.31,817.25) 4137,817.25 ; R25.1@4127.88,800.64 ccw(c4117.31,817.25) 4137,817.25 ; 4137,816.02 ccw(c4157.02,816.02) R25.1@4145.03,799.99 ; 4137,816.02 ccw(c4157.02,816.02) R25.1@4145.03,799.99 ; 4137,816.02 ccw(c4157.02,816.02) R25.1@4145.03,799.99 ; 4137,830 ccw(c4167.48,830) R25.1@4149.22,805.59 ; 4137,830 ccw(c4167.48,830) R25.1@4149.22,805.59 ; 4137,830 ccw(c4167.48,830) R25.1@4149.22,805.59
-LED_6: J80.36 JP43.33 R26.1 | length 4390.9
  Top Layer w7: JP43.33@3580,952 3697,1069 4503,1069 4797,1363 4797,2030.76 4466.64,2361.12 4440.04,2361.12 4439.92,2361 4350.08,2361 4349.96,2361.12 J80.36@4303.55,2361.12 ; JP43.33@3583.08,953.64 3747.71,789 R26.1@4041,789 ; JP43.33@3583.08,933.52 cw(c3583.08,884.94) 3617.43,919.29 ; JP43.33@3583.08,933.52 cw(c3583.08,884.94) 3617.43,919.29 ; JP43.33@3583.08,933.52 cw(c3583.08,884.94) 3617.43,919.29 ; JP43.33@3583.08,940.52 cw(c3583.08,908.84) 3605.48,931.24 ; JP43.33@3583.08,940.52 cw(c3583.08,908.84) 3605.48,931.24 ; JP43.33@3583.08,940.52 cw(c3583.08,908.84) 3605.48,931.24 ; JP43.33@3583.08,966.76 ccw(c3583.08,994.96) 3603.02,975.02 ; JP43.33@3583.08,966.76 ccw(c3583.08,994.96) 3603.02,975.02 ; JP43.33@3583.08,966.76 ccw(c3583.08,994.96) 3603.02,975.02 ; JP43.33@3583.08,973.76 ccw(c3583.08,1018.86) 3614.97,986.97 ; JP43.33@3583.08,973.76 ccw(c3583.08,1018.86) 3614.97,986.97 ; JP43.33@3583.08,973.76 ccw(c3583.08,1018.86) 3614.97,986.97 ; JP43.33@3596.2,953.64 ccw(c3627.88,953.64) 3605.48,931.24 ; JP43.33@3596.2,953.64 cw(c3631.35,953.64) 3606.5,978.5 ; JP43.33@3596.2,953.64 ccw(c3627.88,953.64) 3605.48,931.24 ; JP43.33@3596.2,953.64 cw(c3631.35,953.64) 3606.5,978.5 ; JP43.33@3596.2,953.64 cw(c3631.35,953.64) 3606.5,978.5 ; JP43.33@3596.2,953.64 ccw(c3627.88,953.64) 3605.48,931.24 ; JP43.33@3603.2,953.64 ccw(c3651.78,953.64) 3617.43,919.29 ; JP43.33@3603.2,953.64 cw(c3655.25,953.64) 3618.44,990.44 ; JP43.33@3603.2,953.64 ccw(c3651.78,953.64) 3617.43,919.29 ; JP43.33@3603.2,953.64 cw(c3655.25,953.64) 3618.44,990.44 ; JP43.33@3603.2,953.64 cw(c3655.25,953.64) 3618.44,990.44 ; JP43.33@3603.2,953.64 ccw(c3651.78,953.64) 3617.43,919.29 ; 3978.04,789 cw(c3978.04,731.93) R26.1@4018.4,772.29 ; 3978.04,789 cw(c3978.04,731.93) R26.1@4018.4,772.29 ; 3978.04,789 cw(c3978.04,731.93) R26.1@4018.4,772.29 ; 3983.33,789 ccw(c3983.33,838.6) R26.1@4018.4,803.53 ; 3983.33,789 ccw(c3983.33,838.6) R26.1@4018.4,803.53 ; 3983.33,789 ccw(c3983.33,838.6) R26.1@4018.4,803.53 ; 3994.94,789 cw(c3994.94,748.83) R26.1@4023.35,777.24 ; 3994.94,789 cw(c3994.94,748.83) R26.1@4023.35,777.24 ; 3994.94,789 cw(c3994.94,748.83) R26.1@4023.35,777.24 ; 4000.23,789 ccw(c4000.23,821.7) R26.1@4023.35,798.58 ; 4000.23,789 ccw(c4000.23,821.7) R26.1@4023.35,798.58 ; 4000.23,789 ccw(c4000.23,821.7) R26.1@4023.35,798.58
-LED_7: J80.39 JP43.36 R_LINK.1 | length 4430.3
  Top Layer w7: JP43.36@3818,951 JP43.36@3819.97,952.97 ; JP43.36@3819.3,953.64 JP43.36@3819.97,952.97 ; J80.39@4303.55,2420.17 4466.98,2420.17 4839,2048.15 4839,1345.6 4520.4,1027 3894,1027 JP43.36@3819.97,952.97 ; R_LINK.1@4329,778 4329,865 4277,917 3855.94,917 JP43.36@3819.97,952.97 ; JP43.36@3819.3,933.52 cw(c3819.3,884.94) 3853.65,919.29 ; JP43.36@3819.3,933.52 cw(c3819.3,884.94) 3853.65,919.29 ; JP43.36@3819.3,933.52 cw(c3819.3,884.94) 3853.65,919.29 ; JP43.36@3819.3,940.52 cw(c3819.3,908.84) 3841.7,931.24 ; JP43.36@3819.3,940.52 cw(c3819.3,908.84) 3841.7,931.24 ; JP43.36@3819.3,940.52 cw(c3819.3,908.84) 3841.7,931.24 ; JP43.36@3819.3,966.76 ccw(c3819.3,1001.68) 3843.99,976.99 ; JP43.36@3819.3,966.76 ccw(c3819.3,1001.68) 3843.99,976.99 ; JP43.36@3819.3,966.76 ccw(c3819.3,1001.68) 3843.99,976.99 ; JP43.36@3819.3,973.76 ccw(c3819.3,1025.58) 3855.94,988.94 ; JP43.36@3819.3,973.76 ccw(c3819.3,1025.58) 3855.94,988.94 ; JP43.36@3819.3,973.76 ccw(c3819.3,1025.58) 3855.94,988.94 ; JP43.36@3832.42,953.64 cw(c3860.86,953.64) 3840.75,973.75 ; JP43.36@3832.42,953.64 ccw(c3864.1,953.64) 3841.7,931.24 ; JP43.36@3832.42,953.64 cw(c3860.86,953.64) 3840.75,973.75 ; JP43.36@3832.42,953.64 ccw(c3864.1,953.64) 3841.7,931.24 ; JP43.36@3832.42,953.64 ccw(c3864.1,953.64) 3841.7,931.24 ; JP43.36@3832.42,953.64 cw(c3860.86,953.64) 3840.75,973.75 ; JP43.36@3839.42,953.64 cw(c3884.76,953.64) 3852.7,985.7 ; JP43.36@3839.42,953.64 ccw(c3888,953.64) 3853.65,919.29 ; JP43.36@3839.42,953.64 cw(c3884.76,953.64) 3852.7,985.7 ; JP43.36@3839.42,953.64 ccw(c3888,953.64) 3853.65,919.29 ; JP43.36@3839.42,953.64 ccw(c3888,953.64) 3853.65,919.29 ; JP43.36@3839.42,953.64 cw(c3884.76,953.64) 3852.7,985.7 ; R_LINK.1@4318.4,803.53 ccw(c4292.8,829.13) 4329,829.13 ; R_LINK.1@4318.4,803.53 ccw(c4292.8,829.13) 4329,829.13 ; R_LINK.1@4318.4,803.53 ccw(c4292.8,829.13) 4329,829.13 ; 4329,819.55 ccw(c4365.66,819.55) R_LINK.1@4339.74,793.63 ; 4329,819.55 ccw(c4365.66,819.55) R_LINK.1@4339.74,793.63 ; 4329,819.55 ccw(c4365.66,819.55) R_LINK.1@4339.74,793.63 ; 4329,836.45 ccw(c4382.56,836.45) R_LINK.1@4344.69,798.58 ; 4329,836.45 ccw(c4382.56,836.45) R_LINK.1@4344.69,798.58 ; 4329,836.45 ccw(c4382.56,836.45) R_LINK.1@4344.69,798.58 ; 4329,853.35 ccw(c4399.46,853.35) R_LINK.1@4349.64,803.53 ; 4329,853.35 ccw(c4399.46,853.35) R_LINK.1@4349.64,803.53 ; 4329,853.35 ccw(c4399.46,853.35) R_LINK.1@4349.64,803.53
-LED_8: J80.40 JP43.37 R28.1 | length 4373.3
  Top Layer w7: JP43.37@3896,955 3954,1013 4526.2,1013 4853,1339.8 4853,2053.95 4467.09,2439.86 J80.40@4303.55,2439.86 ; JP43.37@3898.04,953.64 4346.36,953.64 4436,864 R28.1@4436,785 ; JP43.37@3898.04,966.76 ccw(c3898.04,990.23) 3914.63,973.63 ; JP43.37@3898.04,966.76 ccw(c3898.04,990.23) 3914.63,973.63 ; JP43.37@3898.04,966.76 ccw(c3898.04,990.23) 3914.63,973.63 ; JP43.37@3898.04,973.76 ccw(c3898.04,1014.13) 3926.58,985.58 ; JP43.37@3898.04,973.76 ccw(c3898.04,1014.13) 3926.58,985.58 ; JP43.37@3898.04,973.76 ccw(c3898.04,1014.13) 3926.58,985.58 ; JP43.37@3907.32,944.36 cw(c3929.72,921.96) 3929.72,953.64 ; JP43.37@3907.32,944.36 cw(c3929.72,921.96) 3929.72,953.64 ; JP43.37@3907.32,944.36 cw(c3929.72,921.96) 3929.72,953.64 ; JP43.37@3907.32,962.92 ccw(c3929.72,985.32) 3929.72,953.64 ; JP43.37@3907.32,962.92 ccw(c3929.72,985.32) 3929.72,953.64 ; JP43.37@3907.32,962.92 ccw(c3929.72,985.32) 3929.72,953.64 ; JP43.37@3911.16,953.64 cw(c3951.05,953.64) 3922.84,981.84 ; JP43.37@3911.16,953.64 cw(c3951.05,953.64) 3922.84,981.84 ; JP43.37@3911.16,953.64 cw(c3951.05,953.64) 3922.84,981.84 ; JP43.37@3912.27,939.41 cw(c3946.62,905.06) 3946.62,953.64 ; JP43.37@3912.27,939.41 cw(c3946.62,905.06) 3946.62,953.64 ; JP43.37@3912.27,939.41 cw(c3946.62,905.06) 3946.62,953.64 ; JP43.37@3912.27,967.87 ccw(c3946.62,1002.22) 3946.62,953.64 ; JP43.37@3912.27,967.87 ccw(c3946.62,1002.22) 3946.62,953.64 ; JP43.37@3912.27,967.87 ccw(c3946.62,1002.22) 3946.62,953.64 ; JP43.37@3918.16,953.64 cw(c3974.95,953.64) 3934.79,993.79 ; JP43.37@3918.16,953.64 cw(c3974.95,953.64) 3934.79,993.79 ; JP43.37@3918.16,953.64 cw(c3974.95,953.64) 3934.79,993.79 ; R28.1@4420.36,803.53 ccw(c4382.62,841.27) 4436,841.27 ; R28.1@4420.36,803.53 ccw(c4382.62,841.27) 4436,841.27 ; R28.1@4420.36,803.53 ccw(c4382.62,841.27) 4436,841.27 ; R28.1@4425.31,798.58 ccw(c4399.52,824.37) 4436,824.37 ; R28.1@4425.31,798.58 ccw(c4399.52,824.37) 4436,824.37 ; R28.1@4425.31,798.58 ccw(c4399.52,824.37) 4436,824.37 ; 4436,824.3 ccw(c4472.38,824.3) R28.1@4446.66,798.58 ; 4436,824.3 ccw(c4472.38,824.3) R28.1@4446.66,798.58 ; 4436,824.3 ccw(c4472.38,824.3) R28.1@4446.66,798.58 ; 4436,841.2 ccw(c4489.28,841.2) R28.1@4451.61,803.53 ; 4436,841.2 ccw(c4489.28,841.2) R28.1@4451.61,803.53 ; 4436,841.2 ccw(c4489.28,841.2) R28.1@4451.61,803.53
-LED_9: 
-RESET: J80.28 JP43.25 KEY.2 | length 7285.1
  Top Layer w7: JP43.25@2955,953 JP43.25@2955,955 ; JP43.25@2939.67,966.87 ccw(c2909.9,996.64) 2952,996.64 ; JP43.25@2939.67,966.87 ccw(c2909.9,996.64) 2952,996.64 ; JP43.25@2939.67,966.87 ccw(c2909.9,996.64) 2952,996.64 ; JP43.25@2944.62,961.92 ccw(c2926.79,979.74) 2952,979.74 ; JP43.25@2944.62,961.92 ccw(c2926.79,979.74) 2952,979.74 ; JP43.25@2944.62,961.92 ccw(c2926.79,979.74) 2952,979.74 ; 2952,988.89 ccw(c2990.15,988.89) JP43.25@2963.17,961.92 ; 2952,988.89 ccw(c2990.15,988.89) JP43.25@2963.17,961.92 ; 2952,988.89 ccw(c2990.15,988.89) JP43.25@2963.17,961.92 ; 2952,1005.79 ccw(c3007.05,1005.79) JP43.25@2968.12,966.87 ; 2952,1005.79 ccw(c3007.05,1005.79) JP43.25@2968.12,966.87 ; 2952,1005.79 ccw(c3007.05,1005.79) JP43.25@2968.12,966.87
  Top Layer w10: JP43.25@2954,955 2954,1093 3054,1193 4389,1193 4666,1470 4666,1949 4664,1951 4664,1955 4415.36,2203.64 J80.28@4303.55,2203.64
  Bottom Layer w10: v1@4662.5,1951.5 5447,2736 5447,3046 5585,3184 6330,3184 6760,3614 KEY.2@6760,4151.42 ; KEY.2@6741.66,4134.07 cw(c6697.37,4089.79) 6760,4089.79 ; KEY.2@6741.66,4134.07 cw(c6697.37,4089.79) 6760,4089.79 ; KEY.2@6741.66,4134.07 cw(c6697.37,4089.79) 6760,4089.79 ; KEY.2@6748.73,4141.14 cw(c6721.51,4113.93) 6760,4113.93 ; KEY.2@6748.73,4141.14 cw(c6721.51,4113.93) 6760,4113.93 ; KEY.2@6748.73,4141.14 cw(c6721.51,4113.93) 6760,4113.93 ; 6760,4094.62 cw(c6815.8,4094.62) KEY.2@6776.34,4134.07 ; 6760,4094.62 cw(c6815.8,4094.62) KEY.2@6776.34,4134.07 ; 6760,4094.62 cw(c6815.8,4094.62) KEY.2@6776.34,4134.07 ; 6760,4118.76 cw(c6791.66,4118.76) KEY.2@6769.27,4141.14 ; 6760,4118.76 cw(c6791.66,4118.76) KEY.2@6769.27,4141.14 ; 6760,4118.76 cw(c6791.66,4118.76) KEY.2@6769.27,4141.14
  other v1: 4663,1951
-RTS_1: J80.20 JP43.17 | length 3616.7
  Top Layer w7: JP43.17@2323,955 2323,1091 2537,1305 4346,1305 4545,1504 4545,1921 ; J80.20@4303.55,2046.16 4420.23,2046.16 4544.5,1921.88 ; JP43.17@2309.01,967.87 ccw(c2275.22,1001.65) 2323,1001.65 ; JP43.17@2309.01,967.87 ccw(c2275.22,1001.65) 2323,1001.65 ; JP43.17@2309.01,967.87 ccw(c2275.22,1001.65) 2323,1001.65 ; JP43.17@2313.96,962.92 ccw(c2292.12,984.75) 2323,984.75 ; JP43.17@2313.96,962.92 ccw(c2292.12,984.75) 2323,984.75 ; JP43.17@2313.96,962.92 ccw(c2292.12,984.75) 2323,984.75 ; 2323,985.89 ccw(c2355.48,985.89) JP43.17@2332.51,962.92 ; 2323,985.89 ccw(c2355.48,985.89) JP43.17@2332.51,962.92 ; 2323,985.89 ccw(c2355.48,985.89) JP43.17@2332.51,962.92 ; 2323,1002.78 ccw(c2372.38,1002.78) JP43.17@2337.46,967.87 ; 2323,1002.78 ccw(c2372.38,1002.78) JP43.17@2337.46,967.87 ; 2323,1002.78 ccw(c2372.38,1002.78) JP43.17@2337.46,967.87
-RXD-DEBUG: DEBUG.3 J80.66 JP44.12 | length 6810
  Top Layer w7: JP44.12@1915.31,3144.13 cw(c1877.42,3106.25) 1931,3106.25 ; JP44.12@1920.26,3149.08 cw(c1894.32,3123.15) 1931,3123.15 ; 1931,3113.32 cw(c1974.58,3113.32) JP44.12@1943.76,3144.13 ; 1931,3130.22 cw(c1957.68,3130.22) JP44.12@1938.81,3149.08 ; JP44.12@1931,3155 1931,2813 2796.27,1947.73 J80.66@4122.45,1947.73
  Bottom Layer w7: 1929.53,3007.53 JP44.12@1929.53,3158.36
  Bottom Layer w10: DEBUG.3@900,334 778,334 515,597 515,1547.93 1929.53,2962.47 JP44.12@1929.53,3158.36
-RXD_1: J80.18 JP43.15 U24.10 | length 4145.3
  Top Layer w7: J80.18@4303.55,2006.79 4417.21,2006.79 4473,1951 v1(4473,1930) v1@4473,1928 ; 4473,1945.69 cw(c4457.31,1945.69) 4468.4,1934.6 ccw(c4457.31,1945.69) 4473,1945.69 ; 4473,1945.69 ccw(c4488.69,1945.69) 4477.6,1934.6 cw(c4488.69,1945.69) 4473,1945.69
  Top Layer w10: JP43.15@2151.33,966.81 ccw(c2116.5,1001.64) 2165.76,1001.64 ; JP43.15@2158.4,959.73 ccw(c2140.64,977.49) 2165.76,977.49 ; v1@2162.22,1547.46 cw(c2153.68,1538.93) 2165.76,1538.93 cw(c2177.83,1538.93) v1@2169.29,1547.46 ; JP43.15@2165.76,952.64 JP43.15@2165.76,953.64 ; 2165.76,995.55 ccw(c2206.41,995.55) JP43.15@2177.66,966.81 ; v1@2165.76,1551 JP43.15@2165.76,953.64 ; U24.10@2418,799 U24.10@2418,803 2418,841 2386,873 2246.39,873 JP43.15@2165.76,953.64 ; 2165.76,998.6 cw(c2120.8,998.6) 2152.59,966.81 ccw(c2120.8,998.6) 2165.76,998.6 ; 2165.76,998.6 ccw(c2210.71,998.6) 2178.92,966.81 cw(c2210.71,998.6) 2165.76,998.6 ; v1@2160.78,1548.46 cw(c2148.77,1536.45) 2165.76,1536.45 ccw(c2148.77,1536.45) v1@2160.78,1548.46
  Top Layer w15: U24.10@2415,800 U24.10@2415,803
  Bottom Layer w7: 2178,1552 3299,1552 3761,2014 4419,2014 4473,1960 v1@4473,1931 ; 2180.01,1552 cw(c2180.01,1567.69) 2168.91,1556.6 ccw(c2180.01,1567.69) 2180.01,1552 ; 2180.01,1552 ccw(c2180.01,1536.31) 2168.91,1547.4 cw(c2180.01,1536.31) 2180.01,1552 ; v1@4468.4,1934.6 ccw(c4457.31,1945.69) 4473,1945.69 ; v1@4468.4,1934.6 ccw(c4457.31,1945.69) 4473,1945.69 ; v1@4468.4,1934.6 ccw(c4457.31,1945.69) 4473,1945.69 ; 4473,1945.69 ccw(c4488.69,1945.69) v1@4477.6,1934.6 ; 4473,1945.69 ccw(c4488.69,1945.69) v1@4477.6,1934.6 ; 4473,1945.69 ccw(c4488.69,1945.69) v1@4477.6,1934.6
  other v1: 2164.76,1551
-TXD-DEBUG: DEBUG.2 J80.65 JP44.13 | length 6636
  Top Layer w7: JP44.13@1994.05,3144.13 cw(c1957.95,3108.03) 2009,3108.03 ; JP44.13@1999,3149.08 cw(c1974.84,3124.93) 2009,3124.93 ; 2009,3111.53 cw(c2055.1,3111.53) JP44.13@2022.5,3144.13 ; 2009,3128.43 cw(c2038.2,3128.43) JP44.13@2017.55,3149.08 ; JP44.13@2009,3155 2009,2809 2850.58,1967.42 J80.65@4122.45,1967.42
  Bottom Layer w10: DEBUG.2@1000,340 903,437 739,437 553.54,622.46 553.54,1525.99 2008.27,2980.73 JP44.13@2008.27,3158.36